# Altium PCB Chicken_Coop_Door_Motor_Control_Board.PcbDoc
Units mm, origin at the board's own origin, x right, y up, seen from the top; angles counter-clockwise.
Board outline 57.05 x 49.3 mm, 2 copper layers (Top Layer, Bottom Layer), stack 1.549 mm thick; 43 components, 29 nets, 135 pads, 99 vias.
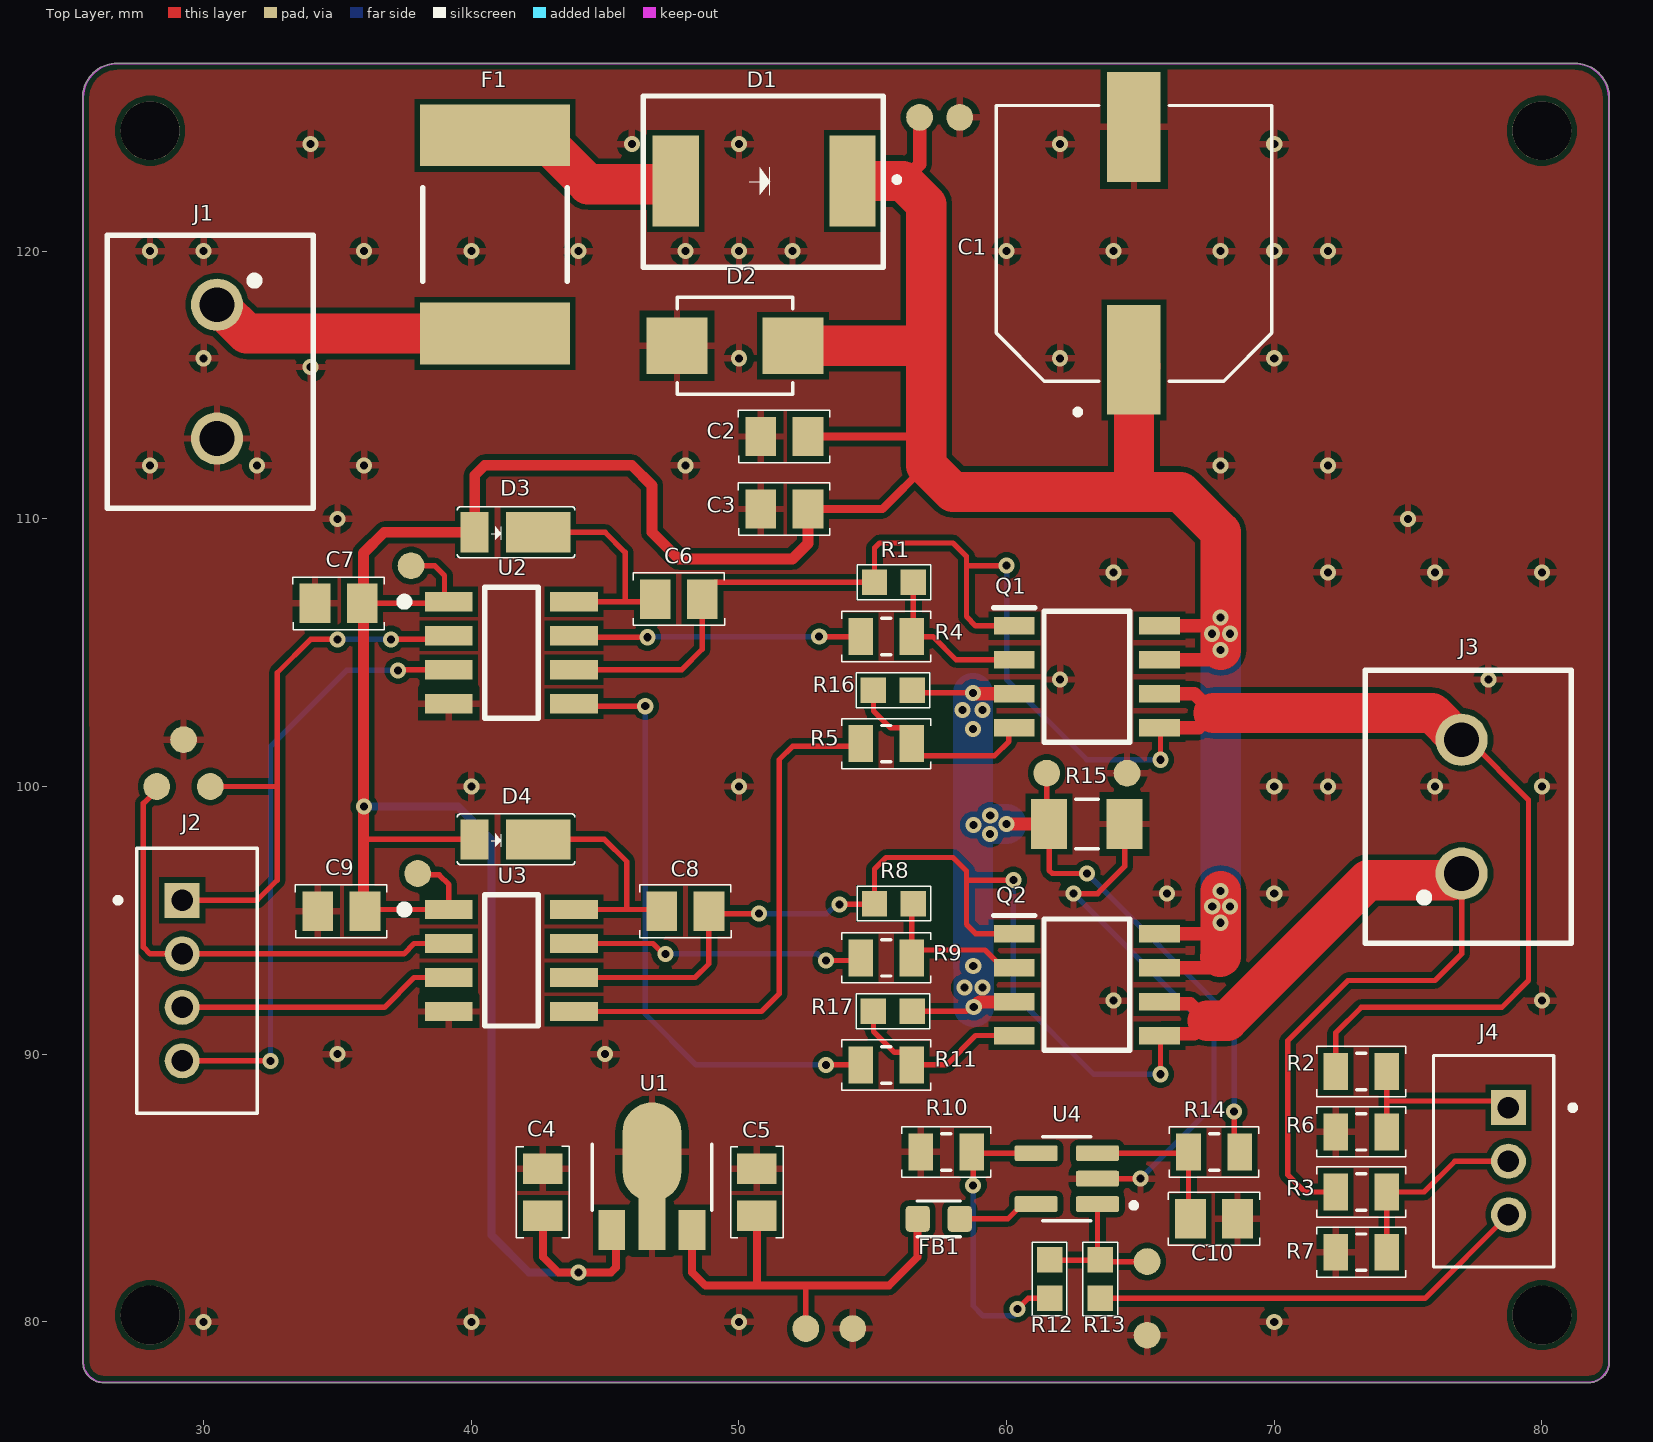
[diagram p0: Top Layer view]
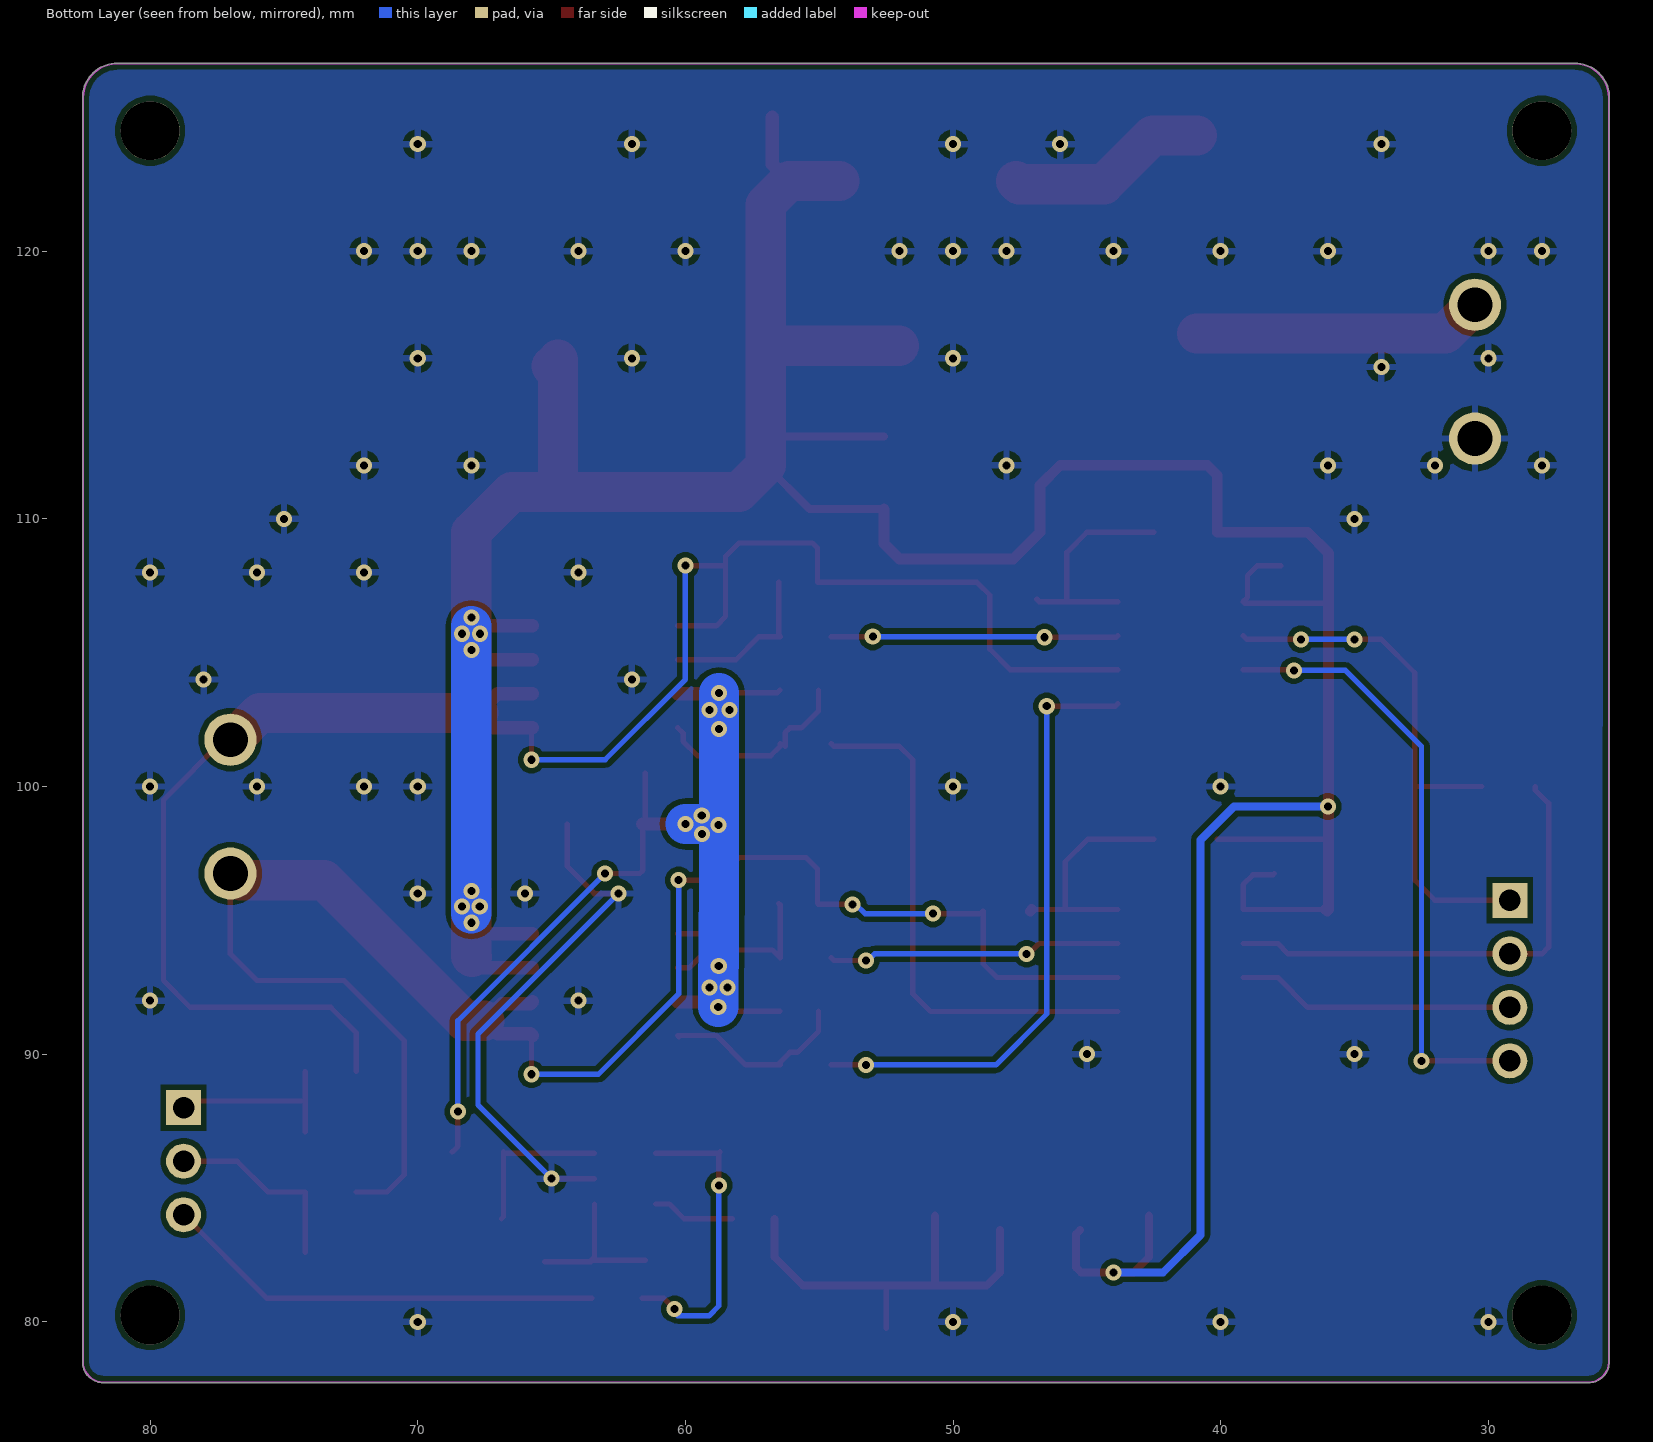
[diagram p1: Bottom Layer view, seen from below]

## Layer stack, top to bottom
Top Solder: solder mask 0.0254, SM-001, Dk 4
Top Layer: signal copper 0.035
Dielectric 1: dielectric 1.4792, FR-4, Dk 4.8
Bottom Layer: signal copper 0.035
Bottom Solder: solder mask 0.0254, SM-001, Dk 4

## Board outline
26.25,77.725 cw(c26.25,78.49) 25.484,78.49 25.484,78.748 25.475,125.73 cw(c26.77,125.73) 26.77,127.025 81.23,127.025 cw(c81.23,125.73) 82.525,125.73 82.525,78.75 82.525,78.5 cw(c81.75,78.5) 81.75,77.725

## Design rules (kind name [scope] priority, off if disabled: settings)
Clearance "Stitching GND" [IsStitchingVia and InNet('GND') vs (IsVia and (Not IsStitchingVia)) Or IsPad] p1: gap=0.127 ignorepadtopadclearanceinfootprint=FALSE
Clearance [All] p2: gap=0.2 ignorepadtopadclearanceinfootprint=FALSE
PolygonConnect [All] p1: connectstyle=Relief reliefconductorwidth=0.254 reliefentries=4 polygonreliefangle="90 Angle" airgapwidth=0.254
RoutingVias [All] p1: holewidth=0.3 width=0.6 viastyle="Through Hole" minholewidth=0.2 minwidth=0.4 maxholewidth=1 maxwidth=2
SolderMaskExpansion [All] p1: expansion=0.102 istentingtop=FALSE
UnRoutedNet [All] p1: checkbadconnections=TRUE
Width [All] p1: maxlimit=5 minlimit=0.1 preferedwidth=0.3 minimp=50.000000 maximp=50.000000 favimp=50.000000
29 further rules are at their usual default settings.

## Components (designator, comment, footprint, x,y, rotation, side; value= is the part's Value field where it differs from the comment)
C1 "330uF" CAP_EEEFK1V331P 64.759,120.293 r90 top
C2 "4.7uF" "CAPC2012X145N 0805" 51.698,113.076 r0 top
C3 "100nF" "CAPC2012X145N 0805" 51.698,110.367 r0 top
C4 "330nF" "CAPC2012X145N 0805" 42.671,84.843 r270 top
C5 "100nF" "CAPC2012X145N 0805" 50.671,84.843 r270 top
C6 "100nF" "CAPC2012X145N 0805" 47.75,107 r180 top
C7 "100nF" "CAPC2012X145N 0805" 35.044,106.842 r0 top
C8 "100nF" "CAPC2012X145N 0805" 47.998,95.342 r180 top
C9 "100nF" "CAPC2012X145N 0805" 35.145,95.342 r0 top
C10 "47nF" "CAPC2012X145N 0805" 67.75,83.85 r180 top
D1 "SS33-E3" "SS33-E3/57T Schottky Diode" 50.944,122.625 r0 top
D2 "SMBJ15CA-TR" "TVS DIODE SMBJ15CA-TR" 49.851,116.467 r0 top
D3 "DFLS240L-7" "DIODE DFLS240L-7  POWERDI 123" 40.125,109.475 r0 top
D4 "DFLS240L-7" "DIODE DFLS240L-7  POWERDI 123" 40.125,98 r0 top
F1 "FSMD2920" "FUSE FSMD200-24-2920-R" 40.891,120.625 r90 top
FB1 "LCB1608-601Y-N" "MPZ1608S601ATA00 0603 1608X95N" 57.465,83.85 r0 top
J1 "Header 2x1" "2x1 Terminal Block" 30.5,115.5 r270 top
J2 "Header 4x1" "JST_B4B-PH-K-S 1x4 Header" 29.75,92.75 r90 top
J3 "Header 2x1" "2x1 Terminal Block" 77,99.25 r90 top
J4 "Header 3x1" "JST_B3B-PH-K-S 1x3 Header" 78.2,86 r90 top
Q1 "PJL9850" "PJL850 N-CH MOSFET" 63,104.1 r0 top
Q2 "PJL9850" "PJL850 N-CH MOSFET" 63,92.6 r0 top
R1 "100k" "RES 0603 ROYALOHM" 55.79,107.628 r180 top
R2 "90.9k" "RES 0805 YAGEO C2012X60N" 73.25,89.35 r180 top
R3 "90.9k" "RES 0805 YAGEO C2012X60N" 73.25,84.85 r180 top
R4 "82R" "RES 0805 YAGEO C2012X60N" 55.5,105.6 r0 top
R5 "1k" "RES 0805 YAGEO C2012X60N" 55.5,101.6 r0 top
R6 "30k" "RES 0805 YAGEO C2012X60N" 73.25,87.1 r0 top
R7 "30k" "RES 0805 YAGEO C2012X60N" 73.25,82.6 r0 top
R8 "100k" "RES 0603 ROYALOHM" 55.79,95.628 r180 top
R9 "82R" "RES 0805 YAGEO C2012X60N" 55.5,93.6 r0 top
R10 "3.3k" "RES 0805 YAGEO C2012X60N" 57.75,86.35 r180 top
R11 "1k" "RES 0805 YAGEO C2012X60N" 55.5,89.6 r0 top
R12 "330k" "RES 0603 ROYALOHM" 61.606,81.6 r270 top
R13 "22R" "RES 0603 ROYALOHM" 63.5,81.6 r270 top
R14 "1k" "RES 0805 YAGEO C2012X60N" 67.75,86.35 r180 top
R15 "0.005R" "RES 1206 YAGEO" 63,98.6 r180 top
R16 "100k" "RES 0603 ROYALOHM" 55.75,103.6 r0 top
R17 "100k" "RES 0603 ROYALOHM" 55.75,91.6 r0 top
U1 "L78L33ABUTR" "LDO L78L33ABUTR SOT89" 46.75,85.41 r0 top
U2 "IR2103STRPBF" "IR2103STRPBF Half Bridge Mosfet Driver" 41.5,105 r0 top
U3 "IR2103STRPBF" "IR2103STRPBF Half Bridge Mosfet Driver" 41.5,93.5 r0 top
U4 "MCP6001T-I" "MCP6001T-I/OT OPAMP SOT-23-5" 62.25,85.35 r180 top

## Footprints (in the part's own frame and the unit in brackets; to place one, negate y for a bottom-side part, rotate by r counter-clockwise, add the part's x,y. Pads: shape width x height; smd on the part's side, far side on the other; paste and mask are expansions set on the pad)
"2x1 Terminal Block" [mm]
  round 1.95 hole 1.3: 1(-2.5,0) 2(2.5,0)
  silkscreen extent -5.1,-4.1 5.1,3.6, body extent -4.95,-4 5.05,3.5, height 11.5
CAP_EEEFK1V331P [mm]
  rect 4.1x2 smd: 1(-4.35,0) 2(4.35,0)
  silkscreen extent -6.4,-5.15 5.15,5.15, body extent -5.85,-5.15 5.85,5.15, height 10.3
"CAPC2012X145N 0805" [mm]
  rect 1.15x1.47 smd: 1(-0.88,0) 2(0.88,0)
  silkscreen extent -1.71,-0.98 1.7,0.98, body extent -1,-0.63 1,0.63, height 0.95
"DIODE DFLS240L-7  POWERDI 123" [mm]
  rect 1.05x1.5 smd mask-2539.97: 1(0,0.025)
  rect 2.4x1.5 smd paste-2539.97 mask-2539.97: 2(2.375,0.025)
  silkscreen extent -0.65,-0.93 3.75,0.98, body extent -0.32,-0.86 3.37,0.92, height 1
"FUSE FSMD200-24-2920-R" [mm]
  rect 2.3x5.6 smd: 1(-3.7,0) 2(3.7,0)
  silkscreen extent -1.75,-2.7 1.75,2.7, body extent -3.99,-2.72 3.99,2.72, height 0.8
"IR2103STRPBF Half Bridge Mosfet Driver" [mm] "SOIC,1.27mm pitch;8 pin,3.90mm W X 4.90mm L X 1.75mm H body"
  rect 1.78x0.72 smd paste+0 mask+0: 1(-2.34,1.905) 2(-2.34,0.635) 3(-2.34,-0.635) 4(-2.34,-1.905) 5(2.34,-1.905) 6(2.34,-0.635) 7(2.34,0.635) 8(2.34,1.905)
  silkscreen extent -4.15,-2.45 1,2.45, body extent -3,-2.45 3,2.45, height 1.76
"JST_B3B-PH-K-S 1x3 Header" [mm]
  rect 1.308x1.308 / inner round 1.308 / far side rect 1.308x1.308 hole 0.8: 1(2,-0.55)
  round 1.308 hole 0.8: 2(0,-0.55) 3(-2,-0.55)
  silkscreen extent -3.95,-3.05 3.95,2.25, body extent -3.95,-2.25 3.95,2.25, height 6
"JST_B4B-PH-K-S 1x4 Header" [mm]
  rect 1.308x1.308 / inner round 1.308 / far side rect 1.308x1.308 hole 0.8: 1(3,0.55)
  round 1.308 hole 0.8: 2(1,0.55) 3(-1,0.55) 4(-3,0.55)
  silkscreen extent -4.95,-2.25 4.95,3.05, body extent -4.95,-2.25 4.95,2.25, height 6
"LDO L78L33ABUTR SOT89" [mm]
  rect 1x1.5 smd paste-2 mask+0: 1(-1.499,-1.981) 3(1.499,-1.981)
  rect 1x2 smd paste-2 mask+0: 2(0,-1.727)
  oval 2.2x3.7 smd paste-3: 2(0,0.94)
  silkscreen extent -2.23,-1.24 2.23,1.22, body extent -2.25,-2.27 2.25,1.83, height 1.6
"MCP6001T-I/OT OPAMP SOT-23-5" [mm]
  rrect25% 1.61x0.59 smd: 1(-1.145,0.95) 2(-1.145,0) 3(-1.145,-0.95) 4(1.145,-0.95) 5(1.145,0.95)
  silkscreen extent -2.6,-1.57 0.9,1.57, body extent -1.35,-1.45 1.35,1.45, height 1.45
"MPZ1608S601ATA00 0603 1608X95N" [mm]
  rrect30% 0.9x0.97 smd: 1(-0.785,0) 2(0.785,0)
  silkscreen extent -0.8,-0.66 0.8,0.66, body extent -0.8,-0.4 0.8,0.4, height 0.95
"PJL850 N-CH MOSFET" [mm]
  rect 1.525x0.65 smd: 1(-2.712,1.905) 2(-2.712,0.635) 3(-2.712,-0.635) 4(-2.712,-1.905) 5(2.712,-1.905) 6(2.712,-0.635) 7(2.712,0.635) 8(2.712,1.905)
  silkscreen extent -3.47,-2.45 1.6,2.58, body extent -3.12,-2.45 2.86,2.45, height 1.74
"RES 0603 ROYALOHM" [mm]
  rect 0.95x0.95 smd: 1(-0.725,0) 2(0.725,0)
  silkscreen extent -1.38,-0.65 1.38,0.65, body extent -0.77,-0.4 0.83,0.4, height 0.45
"RES 0805 YAGEO C2012X60N" [mm]
  rect 0.92x1.38 smd: 1(-0.955,0) 2(0.955,0)
  silkscreen extent -1.67,-0.94 1.67,0.94, body extent -1,-0.63 1,0.63, height 0.6
"RES 1206 YAGEO" [mm]
  rect 1.34x1.86 smd paste+0 mask+0.102: 1(-1.411,0) 2(1.411,0)
  silkscreen extent -0.42,-0.93 0.42,0.93, body extent -1.6,-0.8 1.6,0.8, height 0.89
"SS33-E3/57T Schottky Diode" [mm]
  rect 1.72x3.4 smd: A(-3.305,0) K(3.305,0)
  silkscreen extent -4.52,-3.23 5.05,3.17, body extent -3.97,-2.98 3.97,2.93, height 2.62
"TVS DIODE SMBJ15CA-TR" [mm]
  rect 2.28x2.12 smd paste+0 mask+0.102: 1(-2.165,0) 2(2.165,0)
  silkscreen extent -2.16,-1.81 2.16,1.81, body extent -2.68,-1.94 2.68,1.69, height 2.65

## Part data
C1: library part "CAP Electrolytic EEE-FK1V331P", "330 µF 35 V Aluminum Electrolytic Capacitors Radial, Can - SMD 2000 Hrs @ 105°C", Lifetime @ Temp.="2000 Hrs @ 105°C", Manufacturer="Panasonic Industry", Manufacturer Product Number=EEE-FK1V331P, Operating Temperature="-55°C ~ 105°C", Package / Case="Radial, Can - SMD", Ripple Current @ High Frequency="850 mA @ 100 kHz", Tolerance=±20%, Voltage - Rated="35 V", Capacitance=330uF, ComponentLink1Description="Product Site", ComponentLink1URL=https://www.ozdisan.com/p/aluminyum-kapasitorler-180/panasoniceurope-eeefk1v331p-614518, Impedance="80 mOhms"
C2: library part "CAP 0805 4.7uF CL21B475KOQVPNE", "MLCC (2012) 0805 4.7uF 16VDC ±10% X7R AUTOMOTIVE", Dielectric=X7R, Manufacturer=SAMSUNG, Manufacturer Product Number=CL21B475KOQVPNE, Operating Temp.="-55 °C ~ +125 °C", Package Size=0805, Tolerance="±10 %", Voltage Rating="16 VDC", Capacitance=4.7uF, ComponentLink1Description="Product Site", ComponentLink1URL=https://www.ozdisan.com/p/smt-smd-ve-mlcc-kapasitorler-184/samsung-cl21b475koqvpne-522984
C3 C5 C6 C7 C8 C9: library part "CAP 0805 100nF CC0805JRX7R9BB104", "MLCC 0805 100nF 50VDC ±10% X7R", Dielectric=X7R, Manufacturer=YAGEO, Manufacturer Code=CC0805JRX7R9BB104, Operating Temp.="-55 °C ~ +125 °C", Package Size=0805, Tolerance="±5 %", Voltage Rating=50VDC, Capacitance=100nF, ComponentLink1Description="Product Site", ComponentLink1URL=https://www.ozdisan.com/p/smt-smd-ve-mlcc-kapasitorler-184/yageo-cc0805jrx7r9bb104-748830
C4: library part "CAP 0805 330nF CL21B334KBFNNNE", "MLCC (2012) 0805 330nF 50VDC ±10% X7R", Dielectric=X7R, Manufacturer=SAMSUNG, Manufacturer Product Number=CL21B334KBFNNNE, Operating Temp.="-55 °C ~ +125 °C", Package Size=0805, Tolerance="±10 %", Voltage Rating="50 VDC", Capacitance=330nF, ComponentLink1Description="Product Site", ComponentLink1URL=https://www.ozdisan.com/p/smt-smd-ve-mlcc-kapasitorler-184/samsung-cl21b334kbfnnne-40669
C10: library part "CAP 0805 47nF CL21B473KBCNNNC", "CL21B473KBCNNNC", Dielectric=X7R, Manufacturer=SAMSUNG, Operating Temp.="-55 °C ~ +125 °C", Package Size=0805, Tolerance="±10 %", Voltage Rating="50 VDC", Capacitance=47nF, ComponentLink1Description="Product Site", ComponentLink1URL=https://www.ozdisan.com/p/smt-smd-ve-mlcc-kapasitorler-184/samsung-cl21b473kbcnnnc-10433, Manufacturer Product Number=CL21B473KBCNNNC
D1: library part "DIODE SCHOTTKY SS33-E3/57T", "DIODE SCHOTTKY 30V 3A DO214AB", Current - Average Rectified (Io)=3A, Current - Reverse Leakage @ Vr="500 µA @ 30 V", Manufacturer="Vishay General Semiconductor - Diodes Division", Manufacturer Product Number=SS33-E3/57T, Operating Temperature - Junction="-55°C ~ 125°C", Package / Case="DO-214AB, SMC", Voltage - DC Reverse (Vr) (Max)="30 V", Voltage - Forward (Vf) (Max) @ If="500 mV @ 3 A", ComponentLink1Description="Product Site", ComponentLink1URL=https://www.ozdisan.com/p/schottky-diyotlar-385/vishay-ss33-e3-57t-366018
D2: library part "TVS DIODE SMBJ15CA-TR", "24.4V Clamp 25.1A Ipp Tvs Diode Surface Mount SMB", Current - Peak Pulse (10/1000µs)=25.1A, Manufacturer=STMicroelectronics, Operating Temperature="-55°C ~ 150°C (TJ)", Package / Case="DO-214AA, SMB", Power - Peak Pulse=600W, Voltage - Breakdown (Min)=16.7V, Voltage - Clamping (Max) @ Ipp=24.4V, Voltage - Reverse Standoff (Typ)=15V, ComponentLink1Description="Product Site", ComponentLink1URL=https://www.ozdisan.com/p/tvs-diyotlar-386/stm-smbj15ca-tr-653151, Manufacturer Product Number=SMBJ15CA-TR, Type=Zener
D3 D4: library part "DIODE SCHOTTKY DFLS240L-7", "DIODE SCHOTTK 40V 2A POWERDI 123", Capacitance @ Vr, F="90pF @ 10V, 1MHz", Current - Average Rectified (Io)=2A, Current - Reverse Leakage @ Vr="100 µA @ 40 V", Manufacturer="Diodes Incorporated", Package / Case=POWERDI®123, Voltage - DC Reverse="40 V", Voltage - Forward (Vf) (Max) @ If="500 mV @ 2 A", ComponentLink1Description="Product Site", ComponentLink1URL=https://www.ozdisan.com/p/schottky-diyotlar-385/diodes-dfls240l-7-434954, Manufacturer Product Number=DFLS240L-7
F1: library part "FUSE FSMD200-24-2920-R", "PTC Resettable Fuse 24V 2 A Ih Surface Mount 2920 (7351 Metric), Concave", Current - Hold (Ih) (Max)="2 A", Current - Max="100 A", Current - Trip (It)="4 A", Manufacturer=RFE/Fuzetec, Manufacturer Product Number=FSMD200-24-2920-R, Operating Temperature="-40°C ~ 85°C", Package / Case="2920 (7351 Metric)", Resistance - Post Trip (R1) (Max)="120 mOhms", Voltage - Max=24V, ComponentLink1Description="Product Site", ComponentLink1URL=https://www.ozdisan.com/p/ptc-sigortalar-845/fuzetec-fsmd200-24-2920-r-537039, Time to Trip="5 s"
FB1: library part "Ferrite Bead LCB1608-601Y-N", "600 Ohms @ 100 MHz 1 Power Line Ferrite Bead 0603 (1608 Metric) 1A 200mOhm", Current="1 A", Manufacturer="CORE MASTER", Package Size=0603, Tolerance="±25 %", ComponentLink1Description="Product Site", ComponentLink1URL=http://ozdisan.com/p/bead-feritler-469/core-master-lcb1608-601y-n-496992, DCR="200 m Ohms", Manufacturer Code=LCB1608-601Y-N, Impedance="600 Ohms"
J1 J3: library part "Terminal Block 2x1", "TERM.BLK.5.00MM 2P PCB TYPE GREEN", Current=16A, Manufacturer=DEGSON, Manufacturer Product Number=DG130-5.0-02P-14-00AH, Operating Temperature="-30°C ~ 120°C", Voltage=300V, ComponentLink1Description="Product Site", ComponentLink1URL=https://www.ozdisan.com/p/pcb-klemensler-410/degson-dg130-5-0-02p-14-00ah-740967, Mounting Type=THT, Pitch="0.197\" (5.00mm)"
J2: library part "Header 4x1 DS1066-4MVW6X", "CON.T.B.2MM 4P 180C MALE WHITE CONNFLY", Manufacturer=CONNFLY, Manufacturer Product Number=DS1066-4MVW6X, ComponentLink1Description="Product Site", ComponentLink1URL=https://www.ozdisan.com/p/pcb-konnektorler-310/connfly-ds1066-4mvw6x-357972, Contact Type="Male Pin", Mounting Type="Through Hole", Pitch - Mating="0.079\" (2.00mm)", Series=PH
J4: library part "Header 3x1 DS1066-3MVW6X", "CON.T.B.2.00MM 3P 180C MALE CONNFLY", Manufacturer=CONNFLY, Manufacturer Product Number=DS1066-3MVW6X, ComponentLink1Description="Product Site", ComponentLink1URL=https://www.ozdisan.com/p/pcb-konnektorler-310/connfly-ds1066-3mvw6x-493781, Contact Type="Male Pin", Mounting Type="Through Hole", Pitch - Mating="0.079\" (2.00mm)", Series=PH
Q1 Q2: library part "PJL9850 N-Ch MOSFET", "Low Voltage MOSFET (20-40V,Rds(on)<1) - PJL9850 , N/N Channel, Dual, 5.4A, 40V, SOP-8", Current - Continuous Drain (Id) @ 25°C="5.4A (Ta)", Drain to Source Voltage (Vdss)=40V, Manufacturer=PANJIT, Manufacturer Product Number=PJL9850_R2_00001, Operating Temperature="-55°C ~ 150°C (TJ)", Package / Case=SOP8, ComponentLink1Description="Product Site", ComponentLink1URL=https://www.ozdisan.com/p/discrete-mosfetler-435/panjit-pjl9850-r2-00001-601739, Configuration="2 N-Channel (Dual)", Datasheet Link=https://www.panjit.com.tw/en/Product/downloadPDF/PJL9850, Gate Charge (Qg) (Max) @ Vgs="4.4nC @ 4.5V", Geometry.Height=1.75mm, Rds On (Max) @ Id, Vgs="32mOhm @ 5A, 10V"
R1 R8 R16 R17: library part "RES 0603 100k 0603SAF1003T5E", "RES.(1608) 0603 100K Ohms 1% 1/10W-S 100PPM", Manufacturer=ROYALOHM, Manufacturer Product Number=0603SAF1003T5E, Operating Temperature="-55°C ~ 155°C", Package / Case="0603 (1608 Metric)", Power (Watts)="0.1W, 1/10W", Resistance="100 kOhms", Tolerance="±5 %", ComponentLink1Description="Product Site", ComponentLink1URL=https://www.ozdisan.com/p/smt-smd-ve-cip-direncler-194/royalohm-0603saf1003t5e-339374
R2 R3: library part "RES 0805 90.9k Ohms 0805S8F9092T5E", "RES.(2012) 0805 90.9K Ohms 1% 1/8W-S 100PPM", Manufacturer=ROYALOHM, Manufacturer Code=0805S8F9092T5E, Max Working Current=5A, Max Working Voltage=150VDC, Package / Case=0805, Power=1/8W, Resistance="90.9k Ohms", Tolerance="±1 %", ComponentLink1Description="Product Site", ComponentLink1URL=https://www.ozdisan.com/p/smt-smd-ve-cip-direncler-194/royalohm-0805s8f9092t5e-505592
R4 R9: library part "RES 0805 82 Ohms 0805S8J0820T5E", "RES.(2012) 0805 82 Ohms 5% 1/8W-S 200PPM", Manufacturer=ROYALOHM, Manufacturer Code=0805S8J0820T5E, Max Working Current=5A, Max Working Voltage=150, Package / Case=0805, Power=1/8W, Resistance="82 Ohms", Tolerance="±1 %", ComponentLink1Description="Product Site", ComponentLink1URL=https://www.ozdisan.com/p/smt-smd-ve-cip-direncler-194/royalohm-0805s8j0820t5e-341837
R5 R11 R14: library part "RES 0805 1k Ohms 0805S8F1001TDE", "RES.(2012) 0805 1K Ohms 1% 1/8W-S 100PPM", Manufacturer=ROYALOHM, Manufacturer Code=0805S8F1001TDE, Max Working Current=5A, Max Working Voltage=150VDC, Package / Case=0805, Power=1/8W, Resistance="1k Ohms", Tolerance="±1 %", ComponentLink1Description="Product Site", ComponentLink1URL=https://www.ozdisan.com/p/smt-smd-ve-cip-direncler-194/royalohm-0805s8f1001tde-356631
R6 R7: library part "RES 0805 30k Ohms 0805S8F3002T5E", "RES.(2012) 0805 30K Ohms 1% 1/8W-S 100PPM", Manufacturer=ROYALOHM, Manufacturer Code=0805S8F3002T5E, Max Working Current=5A, Max Working Voltage=150VDC, Package / Case=0805, Power=1/8W, Resistance="30k Ohms", Tolerance="±1 %", ComponentLink1Description="Product Site", ComponentLink1URL=https://www.ozdisan.com/p/smt-smd-ve-cip-direncler-194/royalohm-0805s8f3002t5e-347205
R10: library part "RES 0805 3.3k Ohms 0805S8F3301TDE", "RES.(2012) 0805 3.3K Ohms 1% 1/8W-S 100PPM", Manufacturer=ROYALOHM, Manufacturer Code=0805S8F3301TDE, Max Working Current=5A, Max Working Voltage=150VDC, Package / Case=0805, Power=1/8W, Resistance="3.3k Ohms", Tolerance="±1 %", ComponentLink1Description="Product Site", ComponentLink1URL=https://www.ozdisan.com/p/smt-smd-ve-cip-direncler-194/royalohm-0805s8f3301tde-502827
R12: library part "RES 0603 330k 0603SAF3303T5E", "RES.(1608) 0603 330K Ohms 1% 1/10W-S 100PPM", Manufacturer=ROYALOHM, Manufacturer Product Number=0603SAF3303T5E, Operating Temperature="-55°C ~ 155°C", Package / Case="0603 (1608 Metric)", Power (Watts)="0.1W, 1/10W", Resistance="330 kOhms", Tolerance="±5 %", ComponentLink1Description="Product Site", ComponentLink1URL=https://www.ozdisan.com/p/smt-smd-ve-cip-direncler-194/royalohm-0603saf3303t5e-358867
R13: library part "RES 0603 22 Ohms 0603SAJ0220T5E", "RES.(1608) 0603 22 Ohms 5% 1/10W-S 200PPM", Manufacturer=ROYALOHM, Manufacturer Product Number=0603SAJ0220T5E, Operating Temperature="-55°C ~ 155°C", Package / Case="0603 (1608 Metric)", Power (Watts)="0.1W, 1/10W", Resistance="22 Ohms", Tolerance=±5%, ComponentLink1Description="Product Site", ComponentLink1URL=https://www.ozdisan.com/p/smt-smd-ve-cip-direncler-194/royalohm-0603saj0220t5e-341987
R15: library part "RES 1206 5 mOhms PE1206FRF070R005L", "RES.(3216) 1206 5m Ohms 1% 1/4W 100PPM AEC-Q200 SM", Manufacturer=YAGEO, Manufacturer Code=PE1206FRF070R005L, Max Working Current=5A, Max Working Voltage=150, Package / Case=0805, Power=1/4W, Resistance="5 mOhms", Tolerance="±1 %", ComponentLink1Description="Product Site", ComponentLink1URL=https://www.ozdisan.com/p/smt-smd-ve-cip-direncler-194/yageo-pe1206frf070r005l-854695
U1: library part "LDO L78L33ABUTR", "Linear Voltage Regulator IC Positive Fixed 1 Output 100mA SOT-89-3", Current - Output=100mA, Current - Quiescent (Iq)="5.5 mA", Current - Supply (Max)="6 mA", Manufacturer=STMicroelectronics, Voltage - Output (Min/Fixed)=3.3V, Voltage - Input (Max)=30V, ComponentLink1Description="Product Site", ComponentLink1URL=https://www.ozdisan.com/p/lineer-voltaj-regulatorleri-279/stm-l78l33abutr-350187, Manufacturer Product Number=L78L33ABUTR, Output Type=Fixed
U2 U3: library part "IR2103STRPBF Half Bridge MOSFET Driver", "Half-Bridge Gate Driver IC Inverting, Non-Inverting 8-SOIC", Current - Peak Output (Source, Sink)="210mA, 360mA", High Side Voltage - Max (Bootstrap)="600 V", Logic Voltage - VIL, VIH="0.8V, 3V", Manufacturer="Infineon Technologies", Package / Case=8-SOIC, Voltage - Supply="10V ~ 20V", ComponentLink1Description="Product Site", ComponentLink1URL=https://www.ozdisan.com/p/guc-surucu-entegreleri-270/ir-ir2103strpbf-468696, Driven Configuration=Half-Bridge, Gate Type="IGBT, MOSFET (N-Channel)", Manufacturer Product Number=IR2103STRPBF, Number of Drivers=2, Rise / Fall Time (Typ)="100ns, 50ns"
U4: library part "MCP6001T-I/OT OP-AMP 1 CH LOW POWER", "Standard (General Purpose) Amplifier 1 Circuit Rail-to-Rail SOT-23-5", Current - Output / Channel="23 mA", Current - Supply=100µA, Manufacturer="Microchip Technology", Manufacturer Product Number=MCP6001T-I/OT, Operating Temperature="-40°C ~ 85°C", Package / Case=SOT-23-5, Voltage - Supply Span (Min) - (Max)="1.8V to 6V", Voltage - Input Offset="4.5 mV", ComponentLink1Description="Product Site", ComponentLink1URL=https://www.ozdisan.com/p/amplifikatorler-242/microchip-mcp6001t-i-ot-40820, Gain Bandwidth Product="1 MHz", Output Type=Rail-to-Rail

## Free pads (board coordinates)
  round 2.2 hole 2.2 unplated: 2(28,80.25) 2(28,124.5) 2(80,80.25) 2(80,124.5)
  round 1 smd: 19(30.25,100) 20(28.25,100) 21(29.25,101.75) TP_3V3(52.5,79.75) TP_CURR(65.25,82.25) TP_DR1(37.75,108.25) TP_DR2(38,96.75) TP_GND(54.25,79.75) TP_GND(58.25,125) TP_GND(64.5,100.5) TP_GND(65.25,79.5) TP_SHUNT(61.5,100.5) TP_VP(56.75,125)

## Via types
v1: diameter 0.6, hole 0.3, Top Layer to Bottom Layer, tented both sides, 99 vias

## Nets (pads, with @x,y where several pads share a name; then routed paths per layer and width w, separated by ;. In a path a pad name is that pad's centre, name@x,y a point inside that pad or via, vN(x,y) a via of type N, cw(c..) or ccw(c..) an arc to the next point about the centre after c; other vN are vias at no path point)
+3V3: C5.2 FB1.1 pad.TP_3V3 U1.3 | length 16.3
  Top Layer w0.2: pad.TP_3V3 52.5,81.35
  Top Layer w0.3: U1.3 48.249,81.851 48.75,81.35 50.671,81.35 ; C5.2 50.671,81.35 ; FB1.1 56.68,82.43 55.6,81.35 52.5,81.35 50.671,81.35
+Vin: F1.1 J1.1 | length 10.9
  Top Layer w1.5: J1.1@30.462,117.792 30.537,117.867 30.661,117.867 31.604,116.925 F1.1
+Vp: C1.1 C2.2 C3.2 C4.2 C7.2 C9.2 D1.K D2.2 D3.1 D4.1 pad.TP_DR1 pad.TP_DR2 pad.TP_VP Q1.7 Q1.8 Q2.7 Q2.8 U1.1 U2.1 U3.1 | length 156.5
  Top Layer w0.2: C7.2 35.974,106.842 39.097,106.842 U2.1 39,107.065 39,107.883 38.633,108.25 pad.TP_DR1 ; 35.999,98.025 D4.1 ; C9.2@36.088,95.405 U3.1 39.16,96.34 38.8,96.7 38.05,96.7 pad.TP_DR2
  Top Layer w0.3: C4.2 42.671,82.429 43.25,81.85 v1(44,81.85) 45.224,81.85 45.4,82.026 45.4,83.28 U1.1 ; C3.2 55.367,110.367 57,112 ; C2.2 56.924,113.076
  Top Layer w0.4: 35.999,98.025 35.974,98 ; C9.2@36.088,95.405 C9.2 35.974,95.392 35.974,98 ; C3.2 52.578,109.078 52,108.5 47.75,108.5 46.75,109.5 46.75,111.25 46,112 40.5,112 40.125,111.625 D3.1 36.75,109.5 35.974,108.724 35.974,106.842 35.974,98
  Top Layer w0.5: 56.121,122.625 56.75,123.254 pad.TP_VP ; 56.924,113.076 57,113 ; Q2.7 67.635,93.235 67.973,93.573 67.973,93.627 ; Q2.8 67.905,94.505 68,94.6 ; Q1.7 67.635,104.735 v1(68,105.1) ; Q1.8 67.905,106.005 v1@68,106.1
  Top Layer w1.5: D2.2 56.967,116.467 57,116.5 ; D1.K 56.121,122.625 57,121.746 57,116.5 ; C1.1@65,115.702 C1.1 64.759,111.259 64.5,111 ; 67.973,93.627 68,93.654 68,94.6 v1(68,94.911) v1(68,96.1) ; v1(68,105.1) 68,106.1 68,109.5 66.5,111 64.5,111 ; 57,116.5 57,113 57,112 58,111 64.5,111
  Bottom Layer w0.3: v1(36,99.25) 39.5,99.25 40.75,98 40.75,83.25 42.15,81.85 v1(44,81.85)
  Bottom Layer w1.5: 68,95.25 v1(68,96.1) v1(68,105.1) 68,106
  other v1: 67.684,95.524 68.345,95.524 67.681,105.707 68.343,105.707 67.993,106.321
BWD_HS_GATE: R9.1 U3.7 | length 11
  Top Layer w0.2: U3.7 46.786,94.135 47.171,93.75 v1(47.25,93.75) ; v1(53.25,93.5) 54.445,93.5 R9.1
  Bottom Layer w0.2: v1(47.25,93.75) 52.933,93.75 53.183,93.5 v1(53.25,93.5)
BWD_LS_GATE: R11.1 U2.5 | length 23
  Top Layer w0.2: U2.5 43.935,103 v1(46.5,103) ; v1(53.25,89.6) R11.1
  Bottom Layer w0.2: v1(46.5,103) 46.5,91.5 48.4,89.6 v1(53.25,89.6)
FWD_HS_GATE: R4.1 U2.7 | length 10.7
  Top Layer w0.2: U2.7 43.898,105.577 v1(46.577,105.577) ; v1(53,105.6) R4.1
  Bottom Layer w0.2: v1(46.577,105.577) 46.794,105.577 46.817,105.6 v1(53,105.6)
FWD_LS_GATE: R5.1 U3.5 | length 20
  Top Layer w0.2: U3.5 50.845,91.595 51.5,92.25 51.5,101 52,101.5 54.445,101.5 R5.1
GND: C1.2 C2.1 C3.1 C4.1 C5.1 C7.1 C9.1 C10.1 D2.1 J1.2 pad.21 pad.TP_GND R6.1 R7.1 R10.2 R15.1 U1.2 U2.4 U3.4 U4.2 | length 19.5
  Top Layer w0.2: v1(62.5,96) 63.4,96 64.411,97.011 R15.1 ; U4.2 v1(65,85.35)
  Bottom Layer w0.2: v1(62.5,96) 67.75,90.75 67.75,88.1 v1(65,85.35)
  other v1: 30,80 40,80 50,80 70,80 35,90 45,90 64,92 80,92 66,96 70,96 40,100 50,100 70,100 72,100 76,100 80,100 62,104 78,104 64,108 72,108 76,108 80,108 35,110 75,110 28,112 32,112 36,112 48,112 68,112 72,112 34,115.675 30,116 50,116 62,116 70,116 28,120 30,120 36,120 40,120 40,120 44,120 48,120 50,120 52,120 60,120 60,120 64,120 68,120 70,120 72,120 34,124 46,124 50,124 62,124 70,124
HB_A_SWITCH: C6.1 J3.2 Q1.1 Q1.5 Q1.6 R1.2 R2.2 U2.6 | length 71
  Top Layer w0.2: U2.6 47.865,104.365 48.63,105.13 48.63,107.153 49.105,107.628 R1.2 55.065,108.915 55.25,109.1 58,109.1 58.5,108.6 58.5,108.25 ; v1(60,108.25) 58.5,108.25 ; Q1.1 58.845,106.005 58.5,106.35 58.5,108.25 ; Q1.5 65.75,102.157 v1(65.75,101) ; R2.2 72.295,90.795 73.25,91.75 78.5,91.75 79.5,92.75 79.5,99.5 77.25,101.75 J3.2
  Top Layer w0.5: Q1.5 67.18,102.195 67.735,102.75 ; Q1.6 67.02,103.465 67.735,102.75 ; 67.885,102.6 67.735,102.75
  Top Layer w1.5: 67.735,102.75 75.896,102.75 76.896,101.75 J3.2
  Bottom Layer w0.2: v1(60,108.25) 60,104 63,101 v1(65.75,101)
HB_B_SWITCH: C8.1 J3.1 Q2.1 Q2.5 Q2.6 R3.2 R8.2 U3.6 | length 70.6
  Top Layer w0.2: U3.6 48.365,92.865 48.878,93.378 C8.1 48.97,95.25 v1(50.75,95.25) ; v1(53.75,95.6) 55.037,95.6 R8.2 55.065,96.915 55.5,97.35 58,97.35 58.5,96.85 58.5,96.5 ; v1(60.25,96.5) 58.5,96.5 ; Q2.1 58.845,94.505 58.5,94.85 58.5,96.5 ; Q2.5 65.75,90.657 v1(65.75,89.25) ; R3.2 71.15,84.85 70.5,85.5 70.5,90.5 72.75,92.75 76,92.75 77,93.75 J3.1
  Top Layer w0.5: Q2.5 65.787,90.77 67.02,90.77 67.5,91.25 66.86,91.89 65.787,91.89 Q2.6
  Top Layer w1.5: 67.5,91.25 68.25,91.25 73.5,96.5 76.628,96.5 76.878,96.75 J3.1
  Bottom Layer w0.2: v1(50.75,95.25) 53.292,95.25 53.642,95.6 v1(53.75,95.6) ; v1(60.25,96.5) 60.25,92.25 63.25,89.25 v1(65.75,89.25)
MOTOR_CURRENT: J4.3 R13.2 | length 16.5
  Top Layer w0.2: R13.2 75.625,80.875 J4.3
Motor_INA: J2.4 U2.3 | length 22.9
  Top Layer w0.2: J2.4 v1(32.5,89.75) ; v1(37.27,104.338) 37.297,104.365 U2.3
  Bottom Layer w0.2: v1(32.5,89.75) 32.5,101.5 35.338,104.338 v1(37.27,104.338)
Motor_INB: J2.3 U3.3 | length 10.4
  Top Layer w0.2: J2.3 36.75,91.75 37.865,92.865 U3.3
Motor_PWM_A: J2.1 pad.19 U2.2 | length 21.1
  Top Layer w0.2: J2.1@29.238,95.75 32,95.75 32.75,96.5 32.75,100 ; pad.19 32.75,100 ; v1(35,105.5) 34,105.5 32.75,104.25 32.75,100 ; v1(37,105.5) 39.025,105.5 U2.2
  Bottom Layer w0.2: v1(35,105.5) v1(37,105.5)
Motor_PWM_B: J2.2 pad.20 U3.2 | length 17.9
  Top Layer w0.2: pad.20 28.25,99.869 27.75,99.369 27.75,94 28,93.75 J2.2 37.48,93.75 37.865,94.135 U3.2
MOTOR_VSENSE_A: J4.1 R2.1 R6.2 | length 6.9
  Top Layer w0.2: R6.2 74.205,88.25 ; R2.1 74.205,88.25 ; J4.1 78.5,88.25 74.205,88.25
MOTOR_VSENSE_B: J4.2 R3.1 R7.2 | length 7.3
  Top Layer w0.2: R7.2 R3.1 75.6,84.85 76.75,86 J4.2
NetC6_2: C6.2 D3.2 U2.8 | length 8.5
  Top Layer w0.2: D3.2 45,109.5 45.75,108.75 45.75,106.905 ; U2.8 45.75,106.905 ; C6.2 46.775,106.905 45.75,106.905
NetC8_2: C8.2 D4.2 U3.8 | length 8.7
  Top Layer w0.2: D4.2 44.975,98.025 45.809,97.191 45.809,95.418 ; U3.8 C8.2@47.055,95.405
  Top Layer w0.4: C8.2@47.055,95.405 C8.2
NetC10_2: C10.2 R14.2 U4.3 | length 6
  Top Layer w0.2: U4.3 66.745,86.3 R14.2 66.795,83.925 C10.2
NetD1_A: D1.A F1.2 | length 7.6
  Top Layer w1.5: F1.2 42.541,124.325 44.366,122.5 47.529,122.5 47.639,122.61 D1.A
NetQ1_2: Q1.2 R1.1 R4.2 | length 6.2
  Top Layer w0.2: R1.1 56.515,106.644 56.515,105.66 R4.2 57.25,105.6 58.115,104.735 Q1.2
NetQ1_4: Q1.4 R5.2 R16.1 | length 7.5
  Top Layer w0.2: R16.1 55.025,102.825 55.66,102.19 56.095,102.19 56.274,102.011 R5.2@56.274,101.509 ; R5.2 56.455,101.51 56.815,101.15 59.55,101.15 60.087,101.687 60.087,101.994 Q1.4
NetQ2_2: Q2.2 R8.1 R9.2 | length 6.3
  Top Layer w0.2: R8.1 56.455,95.568 R9.2 56.749,93.894 59.191,93.894 59.851,93.235 Q2.2
NetQ2_4: Q2.4 R11.2 R17.1 | length 7.1
  Top Layer w0.2: R17.1 55.025,90.854 55.812,90.067 56.095,90.067 56.455,89.707 R11.2 57.75,89.6 58.845,90.695 Q2.4 Q2.4@60.25,90.657
NetR10_1: R10.1 R12.2 U4.4 | length 11.2
  Top Layer w0.2: R10.1 R10.1@58.75,86.305 ; v1(58.75,85.1) R10.1@58.75,86.305 ; v1(60.4,80.476) 60.799,80.875 R12.2 ; U4.4 58.755,86.3 R10.1@58.75,86.305
  Bottom Layer w0.2: v1(58.75,85.1) 58.75,80.6 59.124,80.226 v1@60.294,80.226
NetR12_1: pad.TP_CURR R12.1 R13.1 U4.1 | length 5.9
  Top Layer w0.2: R12.1@61.5,82.305 R13.1@63.48,82.305 ; U4.1 63.395,82.43 R13.1 R13.1@63.48,82.305 ; pad.TP_CURR 63.535,82.25 R13.1@63.48,82.305
Q1/Q2_SOURCE: pad.TP_SHUNT Q1.3 Q2.3 R14.1 R15.2 R16.2 R17.2 | length 40.3
  Top Layer w0.2: R17.2 58.501,91.6 58.664,91.763 v1(58.772,91.763) ; R16.2 56.575,103.5 v1(58.75,103.5) ; pad.TP_SHUNT 61.5,98.689 R15.2 61.589,96.869 61.708,96.75 v1(63,96.75) ; v1(68.5,87.85) 68.5,86.555 R14.1
  Top Layer w0.5: v1(58.75,103.5) 58.777,103.5 58.812,103.465 Q1.3 ; v1(58.772,91.763) 58.799,91.763 58.987,91.951 60.274,91.951 Q2.3 ; v1(60,98.6) R15.2
  Bottom Layer w0.2: v1(63,96.75) 68.5,91.25 v1(68.5,87.85)
  Bottom Layer w1.5: v1(58.75,103.5) v1(58.75,102.143) 58.75,100.372 v1@58.75,98.6 ; v1(58.772,91.763) 58.772,93.276 v1(58.755,93.294) 58.755,95.188 58.75,95.193 v1@58.75,98.6 ; v1(60,98.6) v1@58.75,98.6
  other v1: 58.428,92.488 59.107,92.488 59.378,98.225 58.761,98.558 59.39,98.916 58.344,102.851 59.107,102.851
VCC: FB1.2 U4.5 | length 3.1
  Top Layer w0.2: FB1.2 60.045,83.85 60.595,84.4 U4.5

## Polygon pours and split planes (outlines as drawn)
GND on Bottom Layer "GND_L02_P001" (solid, remove dead copper, pour order 1): 25,127.5 25,77 83.5,77 83.5,126.5 82.5,127.5
GND on Top Layer "GND_L01_P000" (solid, remove dead copper, pour order 0): 25,127.5 25.25,127.25 25.25,76.75 81.75,76.75 83.25,78.25 83.25,127.75

## Keep-outs
Keep-Out Layer:
  lines w0.05: 27,127 26.77,127 ; 26.77,127 ccw(c26.77,125.73) 25.5,125.73 25.51,78.748 25.51,78.49 ccw(c26.25,78.49) 26.25,77.75 81.75,77.75 ccw(c81.75,78.5) 82.5,78.5 82.5,78.75 82.5,125.73 ccw(c81.23,125.73) 81.23,127 26.77,127